# EAGLE board olimex (EAGLE 5.10)
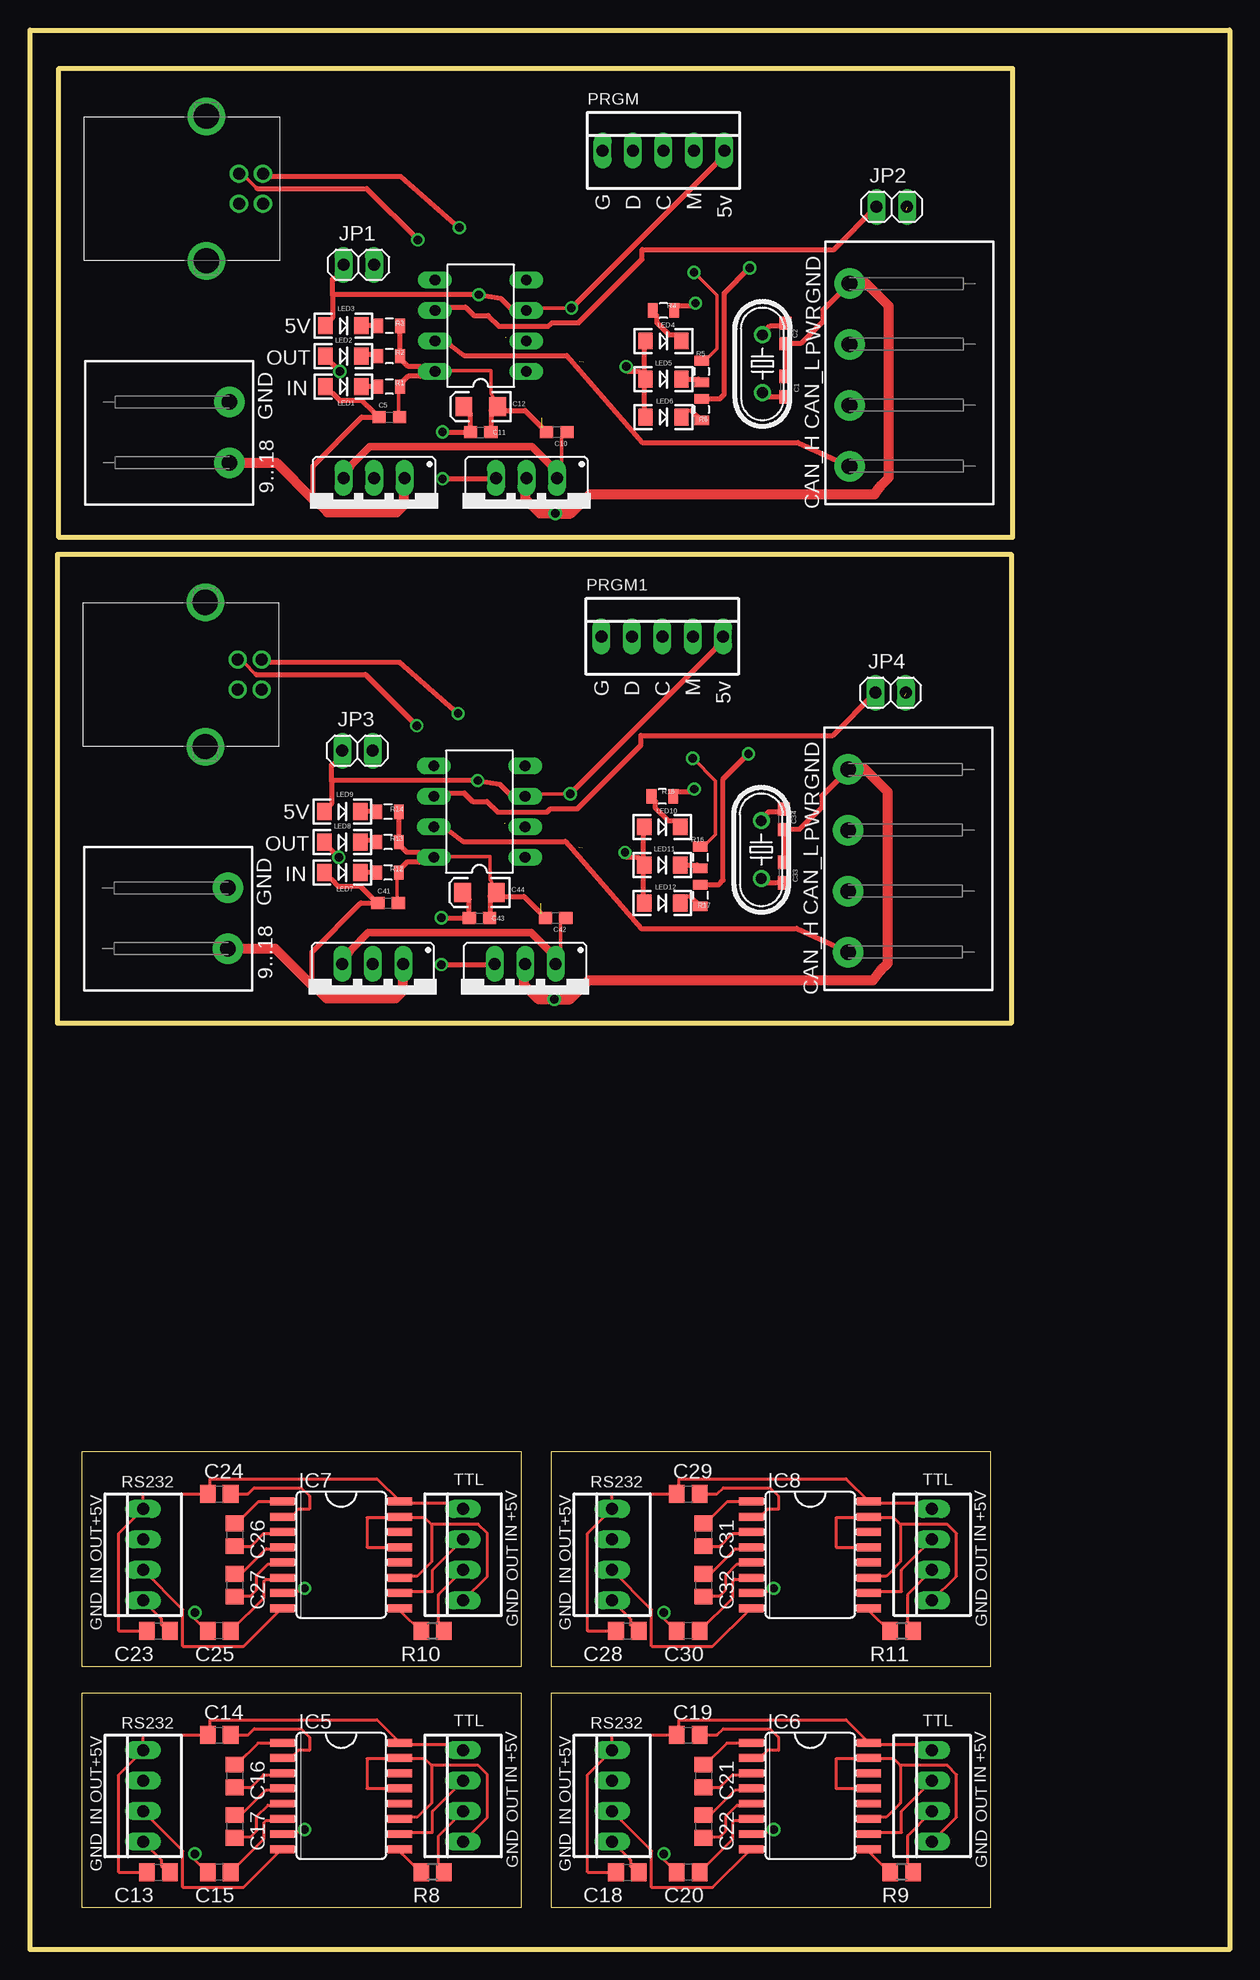
[diagram p0: board, top side]
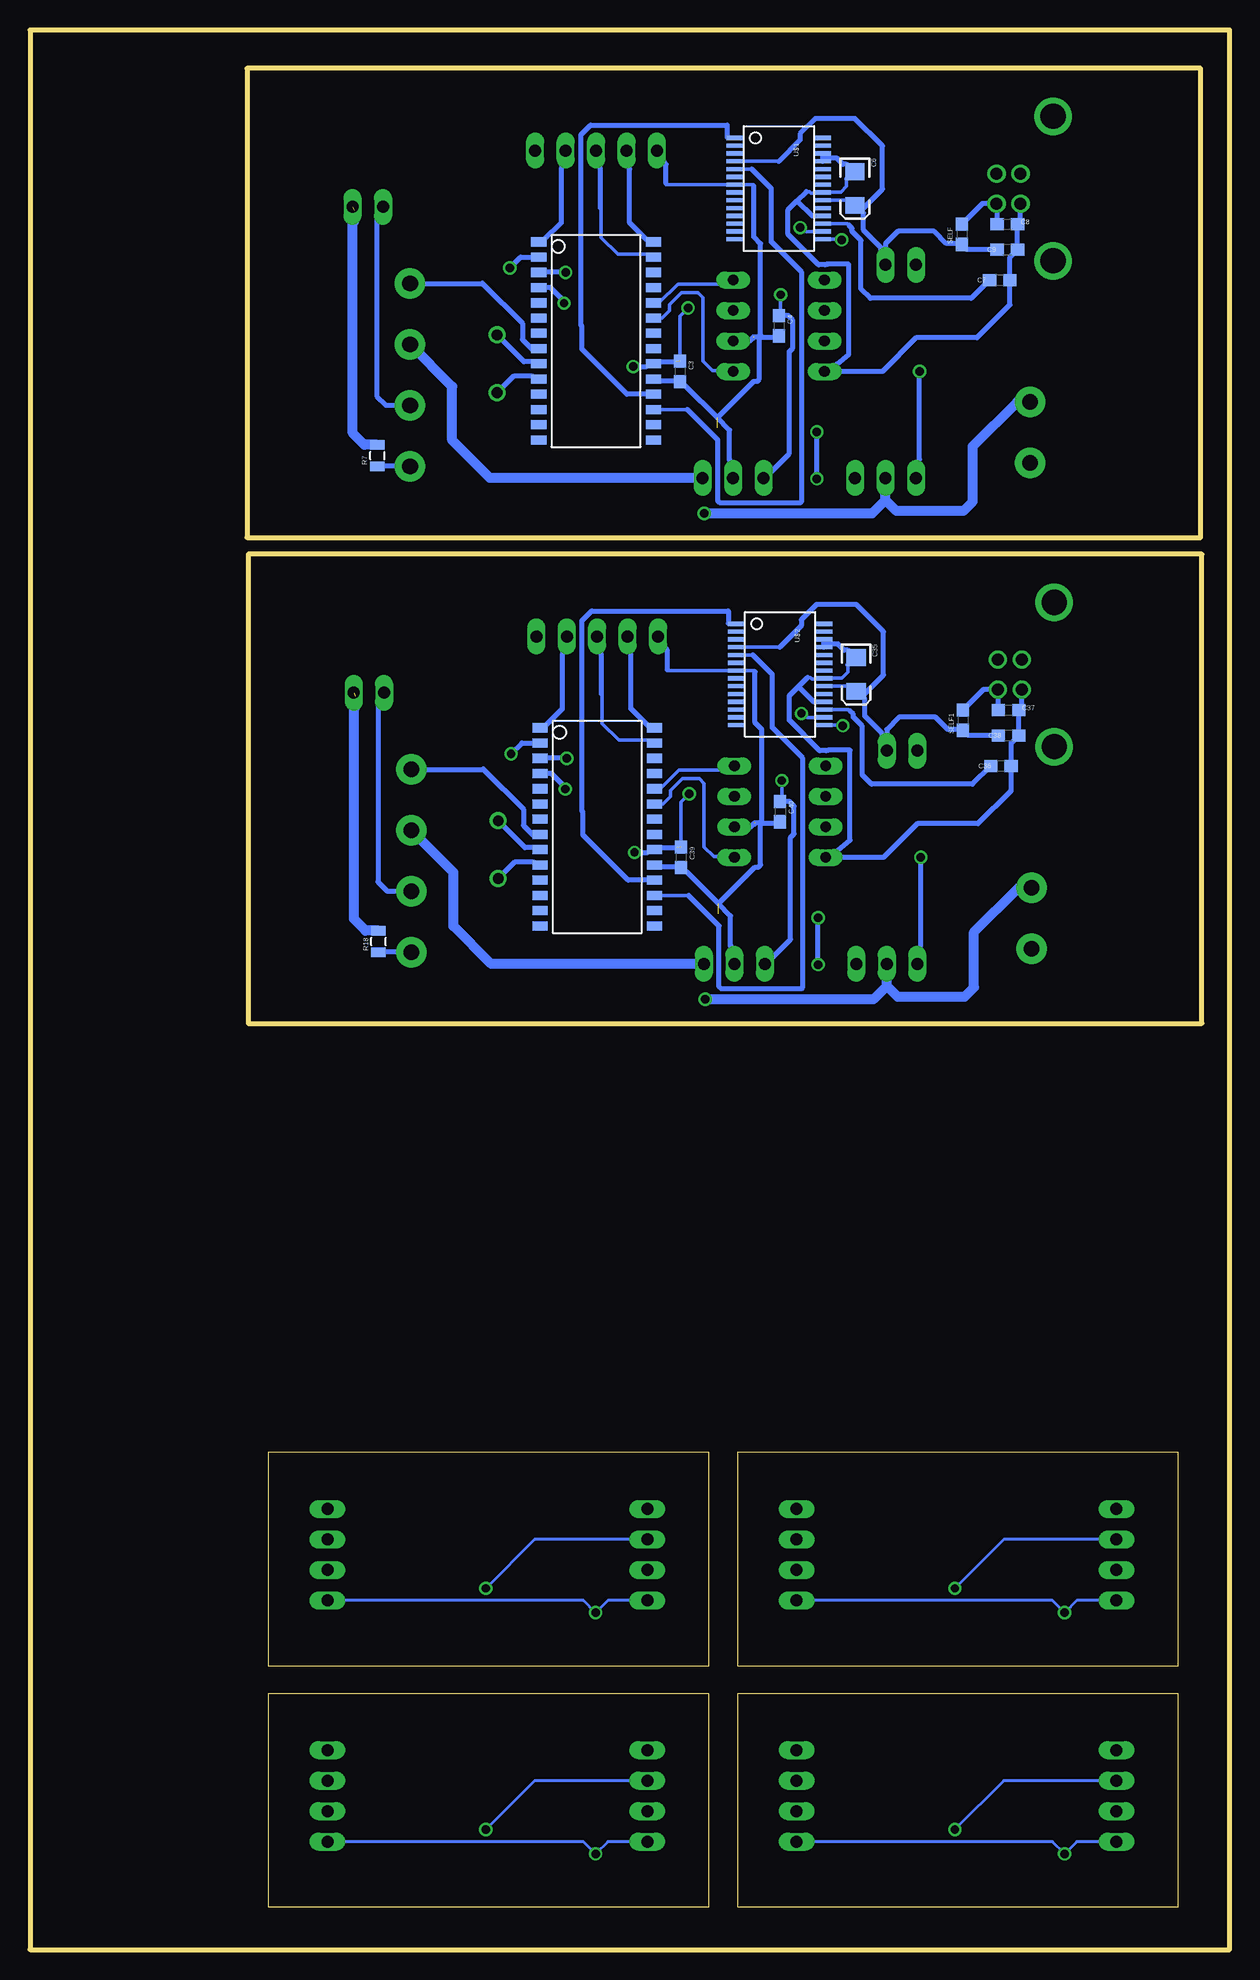
[diagram p1: board, bottom side, seen from below]

Size 100 x 160 mm. Coordinates in mm from the lower left corner, seen from the top.
Outline: 2.4,117.7 2.4,156.8 81.9,156.8 81.9,117.7 2.4,117.7
Outline: 0,160 100,160 100,0 0,0 0,160
Outline: 4.32,3.51 40.99,3.51 40.99,21.36 4.32,21.36 4.32,3.51
Outline: 43.42,3.51 80.09,3.51 80.09,21.36 43.42,21.36 43.42,3.51
Outline: 4.32,23.61 40.99,23.61 40.99,41.46 4.32,41.46 4.32,23.61
Outline: 43.42,23.61 80.09,23.61 80.09,41.46 43.42,41.46 43.42,23.61
Outline: 2.3,77.2 2.3,116.3 81.8,116.3 81.8,77.2 2.3,77.2
Copper layers (1*16): Top 0.035mm / dielectric 1.5mm / Bottom 0.035mm
Design rules "10mils": minimum track width 10mil, minimum drill 24mil, track to track 10mil, track to pad 10mil, pad to pad 10mil, via to via 10mil, smd to smd 10mil, copper to edge 40mil, drill to drill 10mil, minimum pad ring 10mil, minimum via ring 8mil, stop-mask expansion 0mil, vias tented up to drill 0mil, thermal gap 10mil

## Footprints (pad centres in the part's own frame; a part is rotated, then mirrored left to right if it is on the bottom)
0603 = smd 1.1 x 1: 1 -0.85,0; 2 0.85,0
EIA3216 = smd 1.4 x 1.6: A 1.4,0; C -1.4,0
C0805 = smd 1.3 x 1.5: 1 -0.95,0; 2 0.95,0
508_2 = drill 1.3 pad 2.54 round: P$1 -3.81,-5.08; P$2 1.27,-5.08
508_4 = drill 1.3 pad 2.54 round: P$1 -7.62,-5.08; P$2 -2.54,-5.08; P$3 2.54,-5.08; P$4 7.62,-5.08
SO28W = smd 0.762 x 1.27: 1 -7.62,-4.78; 2 -6.35,-4.78; 3 -5.08,-4.78; 4 -3.81,-4.78; 5 -2.54,-4.78; 6 -1.27,-4.78; 7 0,-4.78; 8 1.27,-4.78; 9 2.54,-4.78; 10 3.81,-4.78; 11 5.08,-4.78; 12 6.35,-4.78; 13 7.62,-4.78; 14 8.89,-4.78; 15 8.89,4.78; 16 7.62,4.78; 17 6.35,4.78; 18 5.08,4.78; 19 3.81,4.78; 20 2.54,4.78; 21 1.27,4.78; 22 0,4.78; 23 -1.27,4.78; 24 -2.54,4.78; 25 -3.81,4.78; 26 -5.08,4.78; 27 -6.35,4.78; 28 -7.62,4.78
78XXS = drill 1 long: GND 0,-2.54; IN -2.54,-2.54; OUT 2.54,-2.54
DIL08 = drill 0.9 long: 1 -3.81,-3.81; 2 -1.27,-3.81; 3 1.27,-3.81; 4 3.81,-3.81; 5 3.81,3.81; 6 1.27,3.81; 7 -1.27,3.81; 8 -3.81,3.81
SO16L = smd 0.66 x 2.032: 1 -4.445,-4.902; 2 -3.175,-4.902; 3 -1.905,-4.902; 4 -0.635,-4.902; 5 0.635,-4.902; 6 1.905,-4.902; 7 3.175,-4.902; 8 4.445,-4.902; 9 4.445,4.902; 10 3.175,4.902; 11 1.905,4.902; 12 0.635,4.902; 13 -0.635,4.902; 14 -1.905,4.902; 15 -3.175,4.902; 16 -4.445,4.902
1X02 = drill 1 long: 1 -1.27,0; 2 1.27,0
LED-1206 = smd 1.2 x 1.4: A -1.5,0; C 1.5,0
22-23-2051 = drill 1 long: 1 -5.08,0; 2 -2.54,0; 3 0,0; 4 2.54,0; 5 5.08,0
HC49U-V = drill 0.9 round: 1 -2.413,0; 2 2.413,0
0805 = smd 0.8 x 1.2: 1 -0.9,0; 2 0.9,0
R0805 = smd 1.3 x 1.5: 1 -0.95,0; 2 0.95,0
SSOP28DB = smd 0.348 x 1.397: 1 -4.225,-3.656; 2 -3.575,-3.656; 3 -2.925,-3.656; 4 -2.275,-3.656; 5 -1.625,-3.656; 6 -0.975,-3.656; 7 -0.325,-3.656; 8 0.325,-3.656; 9 0.975,-3.656; 10 1.625,-3.656; 11 2.275,-3.656; 12 2.925,-3.656; 13 3.575,-3.656; 14 4.225,-3.656; 15 4.225,3.656; 16 3.575,3.656; 17 2.925,3.656; 18 2.275,3.656; 19 1.625,3.656; 20 0.975,3.656; 21 0.325,3.656; 22 -0.325,3.656; 23 -0.975,3.656; 24 -1.625,3.656; 25 -2.275,3.656; 26 -2.925,3.656; 27 -3.575,3.656; 28 -4.225,3.656
22-23-2041 = drill 1 long: 1 -3.81,0; 2 -1.27,0; 3 1.27,0; 4 3.81,0
85-32004-10X = drill 1 pad 1.27 round: 1 4.71,-1.25; 2 4.71,1.25; 3 2.71,1.25; 4 2.71,-1.25 | drill 2.1 pad 3 round: M1 0,6.02; M2 0,-6.02

## Placement (x,y rotation side)
C1  [0603]  62.97,130.27 270 top
C2  [0603]  62.97,134.72 90 top
C3  0,1u  [0603]  45.83,131.54 270 bottom
C4  0,1u  [0603]  37.57,135.35 270 bottom
C5  0,1u  [0603]  29.95,127.73 0 top
C6  10u  [EIA3216]  31.22,146.78 270 bottom
C7  0,1u  [0603]  19.16,139.16 0 bottom
C8  10n  [0603]  18.52,143.81 0 bottom
C9  0,1u  [0603]  18.52,141.7 0 bottom
C10  0,1u  [0603]  43.92,126.46 180 top
C11  0,1u  [0603]  37.57,126.46 0 top
C12  10u  [EIA3216]  37.57,128.6 180 top
C13  0.1u  [C0805]  10.7,6.45 0 top
C14  0.1  [C0805]  15.78,17.88 0 top
C15  0.1  [C0805]  15.78,6.45 180 top
C16  0.1  [C0805]  17.05,14.47 270 top
C17  0.1  [C0805]  17.05,10.26 270 top
C18  0.1u  [C0805]  49.8,6.45 0 top
C19  0.1  [C0805]  54.88,17.88 0 top
C20  0.1  [C0805]  54.88,6.45 180 top
C21  0.1  [C0805]  56.15,14.47 270 top
C22  0.1  [C0805]  56.15,10.26 270 top
C23  0.1u  [C0805]  10.7,26.55 0 top
C24  0.1  [C0805]  15.78,37.98 0 top
C25  0.1  [C0805]  15.78,26.55 180 top
C26  0.1  [C0805]  17.05,34.57 270 top
C27  0.1  [C0805]  17.05,30.36 270 top
C28  0.1u  [C0805]  49.8,26.55 0 top
C29  0.1  [C0805]  54.88,37.98 0 top
C30  0.1  [C0805]  54.88,26.55 180 top
C31  0.1  [C0805]  56.15,34.57 270 top
C32  0.1  [C0805]  56.15,30.36 270 top
C33  [0603]  62.87,89.77 270 top
C34  [0603]  62.87,94.22 90 top
C35  10u  [EIA3216]  31.12,106.28 270 bottom
C36  0,1u  [0603]  19.05,98.66 0 bottom
C37  10n  [0603]  18.42,103.31 0 bottom
C38  0,1u  [0603]  18.42,101.2 0 bottom
C39  0,1u  [0603]  45.73,91.04 270 bottom
C40  0,1u  [0603]  37.47,94.85 270 bottom
C41  0,1u  [0603]  29.85,87.23 0 top
C42  0,1u  [0603]  43.82,85.96 180 top
C43  0,1u  [0603]  37.47,85.96 0 top
C44  10u  [EIA3216]  37.47,88.1 180 top
CAMDEN_2P1  [508_2]  11.54,127.73 90 top
CAMDEN_2P2  [508_2]  11.44,87.23 90 top
CAMDEN_4P-1  [508_4]  73.39,131.25 270 top
CAMDEN_4P-2  [508_4]  73.3,90.75 270 top
DRILEGEND  [DRILEGEND]  -0.2,-4.01 0 top  (outside the outline)
IC1  PIC18F2580-E/SO  [SO28W]  52.81,134.72 270 bottom
IC2  7812  [78XXS]  28.68,120.11 180 top
IC3  PCA82C250  [DIL08]  37.57,135.35 90 top
IC4  7805  [78XXS]  41.38,120.11 180 top
IC5  MAX232ECWE  [SO16L]  25.94,12.8 270 top
IC6  MAX232ECWE  [SO16L]  65.04,12.8 270 top
IC7  MAX232ECWE  [SO16L]  25.94,32.9 270 top
IC8  MAX232ECWE  [SO16L]  65.04,32.9 270 top
IC9  PIC18F2580-E/SO  [SO28W]  52.71,94.22 270 bottom
IC10  PCA82C250  [DIL08]  37.47,94.85 90 top
IC11  7812  [78XXS]  28.58,79.61 180 top
IC12  7805  [78XXS]  41.28,79.61 180 top
JP1  [1X02]  27.41,140.43 180 top
JP2  [1X02]  71.85,145.25 180 top
JP3  [1X02]  27.31,99.93 180 top
JP4  [1X02]  71.75,104.75 180 top
LED1  [LED-1206]  26.14,130.27 0 top
LED2  [LED-1206]  26.14,132.81 0 top
LED3  [LED-1206]  26.14,135.35 0 top
LED4  [LED-1206]  52.81,134.08 0 top
LED5  [LED-1206]  52.81,130.91 0 top
LED6  [LED-1206]  52.81,127.73 0 top
LED7  [LED-1206]  26.04,89.77 0 top
LED8  [LED-1206]  26.04,92.31 0 top
LED9  [LED-1206]  26.04,94.85 0 top
LED10  [LED-1206]  52.71,93.58 0 top
LED11  [LED-1206]  52.71,90.41 0 top
LED12  [LED-1206]  52.71,87.23 0 top
PRGM  22-23-2051  [22-23-2051]  52.81,149.96 0 top
PRGM1  22-23-2051  [22-23-2051]  52.71,109.45 0 top
Q1  [HC49U-V]  61.06,132.18 90 top
Q2  [HC49U-V]  60.97,91.67 90 top
R1  560  [0805]  29.95,130.27 180 top
R2  560  [0805]  29.95,132.81 180 top
R3  560  [0805]  29.95,135.35 180 top
R4  560  [0805]  52.81,136.62 180 top
R5  560  [0805]  55.98,131.54 270 top
R6  560  [0805]  55.98,128.37 270 top
R7  120  [0805]  71.05,124.53 90 bottom
R8  470  [R0805]  33.56,6.45 180 top
R9  470  [R0805]  72.66,6.45 180 top
R10  470  [R0805]  33.56,26.55 180 top
R11  470  [R0805]  72.66,26.55 180 top
R12  560  [0805]  29.85,89.77 180 top
R13  560  [0805]  29.85,92.31 180 top
R14  560  [0805]  29.85,94.85 180 top
R15  560  [0805]  52.71,96.12 180 top
R16  560  [0805]  55.88,91.04 270 top
R17  560  [0805]  55.88,87.86 270 top
R18  120  [0805]  70.94,84.03 90 bottom
SELF  [0603]  22.33,142.97 270 bottom
SELF1  [0603]  22.23,102.47 270 bottom
U$1  FT232RL-BASICSSOP  [SSOP28DB]  37.57,146.78 270 bottom
U$2  FT232RL-BASICSSOP  [SSOP28DB]  37.47,106.28 270 bottom
X1  22-23-2041  [22-23-2041]  36.1,12.8 90 top
X2  MINI-USB_4P-85-32004-10X  [85-32004-10X]  14.71,146.78 0 top
X3  22-23-2041  [22-23-2041]  9.43,12.8 90 top
X4  22-23-2041  [22-23-2041]  75.2,12.8 90 top
X5  22-23-2041  [22-23-2041]  48.53,12.8 90 top
X6  22-23-2041  [22-23-2041]  36.1,32.9 90 top
X7  22-23-2041  [22-23-2041]  9.43,32.9 90 top
X8  22-23-2041  [22-23-2041]  75.2,32.9 90 top
X9  22-23-2041  [22-23-2041]  48.53,32.9 90 top
X10  MINI-USB_4P-85-32004-10X  [85-32004-10X]  14.61,106.28 0 top

## Library data of the parts
C1-C12 C33-C44 LED1-LED12 R1-R7 R12-R18 SELF SELF1 U$1 U$2 = SparkFun
C13-C32 R8-R11 = rcl
CAMDEN_2P1 CAMDEN_2P2 CAMDEN_4P-1 CAMDEN_4P-2 = mycomponents
DRILEGEND = drilegend
IC1 IC9 = microchip
IC2 IC4 IC11 IC12 = v-reg
IC3 IC10 = micro-philips
IC5-IC8 = maxim
JP1-JP4 = pinhead
PRGM PRGM1 X1 X3-X9 = con-molex
Q1 Q2 = crystal
X2 X10 = con-cypressindustries

## Nets
5V: C3.1 C4.1 C11.1 C12.A IC1.20 IC3.3 IC4.OUT JP1.2 LED3.A LED4.A LED5.A LED6.A PRGM.5
5V1: C39.1 C40.1 C43.1 C44.A IC9.20 IC10.3 IC12.OUT JP3.2 LED9.A LED10.A LED11.A LED12.A PRGM1.5
+5V: C13.1 C14.1 IC5.16 X1.4 X3.4
+5V1: C18.1 C19.1 IC6.16 X4.4 X5.4
+5V2: C23.1 C24.1 IC7.16 X6.4 X7.4
+5V3: C28.1 C29.1 IC8.16 X8.4 X9.4
+12V: C10.1 CAMDEN_4P-1.P$2 IC2.OUT IC4.IN LED2.A
+12V1: C42.1 CAMDEN_4P-2.P$2 IC11.OUT IC12.IN LED8.A
+18V: C5.1 CAMDEN_2P1.P$1 IC2.IN LED1.A
+18V1: C41.1 CAMDEN_2P2.P$1 IC11.IN LED7.A
CAN_H: CAMDEN_4P-1.P$4 IC3.7 R7.1
CAN_H1: CAMDEN_4P-2.P$4 IC10.7 R18.1
CAN_L: CAMDEN_4P-1.P$3 IC3.6 JP2.2
CAN_L1: CAMDEN_4P-2.P$3 IC10.6 JP4.2
GND: C1.1 C2.1 C3.2 C4.2 C5.2 C6.C C7.2 C8.2 C9.2 C10.2 C11.2 C12.C CAMDEN_2P1.P$2 CAMDEN_4P-1.P$1 IC1.8 IC1.19 IC2.GND IC3.2 IC3.8 IC4.GND PRGM.1 R1.1 R2.1 R3.1 U$1.7 U$1.18 U$1.21 U$1.25 U$1.26 X2.4
GND1: C13.2 C15.2 IC5.11 IC5.13 IC5.15 X1.1 X3.1
GND2: C18.2 C20.2 IC6.11 IC6.13 IC6.15 X4.1 X5.1
GND3: C23.2 C25.2 IC7.11 IC7.13 IC7.15 X6.1 X7.1
GND4: C28.2 C30.2 IC8.11 IC8.13 IC8.15 X8.1 X9.1
GND5: C33.1 C34.1 C35.C C36.2 C37.2 C38.2 C39.2 C40.2 C41.2 C42.2 C43.2 C44.C CAMDEN_2P2.P$2 CAMDEN_4P-2.P$1 IC9.8 IC9.19 IC10.2 IC10.8 IC11.GND IC12.GND PRGM1.1 R12.1 R13.1 R14.1 U$2.7 U$2.18 U$2.21 U$2.25 U$2.26 X10.4
MCLR: IC1.1 PRGM.4
MCLR1: IC9.1 PRGM1.4
N$1: C2.2 IC1.9 Q1.2
N$2: C1.2 IC1.10 Q1.1
N$3: IC1.23 IC3.1
N$4: C8.1 SELF.1 X2.1
N$5: C6.A C9.1 JP1.1 SELF.2 U$1.4 U$1.20
N$6: U$1.16 X2.2
N$7: C7.1 U$1.17
N$8: U$1.15 X2.3
N$9: IC1.24 IC3.4
N$10: LED1.C R1.2
N$11: LED2.C R2.2
N$12: LED3.C R3.2
N$13: LED4.C R4.2
N$14: IC1.2 R6.1
N$15: LED5.C R5.2
N$16: LED6.C R6.2
N$17: IC1.3 R5.1
N$18: IC1.4 R4.1
N$19: JP2.1 R7.2
N$20: C16.1 IC5.1
N$21: C17.1 IC5.4
N$22: C16.2 IC5.3
N$23: C17.2 IC5.5
N$24: C14.2 IC5.2
N$25: C15.1 IC5.6
N$26: C21.1 IC6.1
N$27: C22.1 IC6.4
N$28: C21.2 IC6.3
N$29: C22.2 IC6.5
N$30: C19.2 IC6.2
N$31: C20.1 IC6.6
N$32: C26.1 IC7.1
N$33: C27.1 IC7.4
N$34: C26.2 IC7.3
N$35: C27.2 IC7.5
N$36: C24.2 IC7.2
N$37: C25.1 IC7.6
N$38: C31.1 IC8.1
N$39: C32.1 IC8.4
N$40: C31.2 IC8.3
N$41: C32.2 IC8.5
N$42: C29.2 IC8.2
N$43: C30.1 IC8.6
N$44: C34.2 IC9.9 Q2.2
N$45: C33.2 IC9.10 Q2.1
N$46: C35.A C38.1 JP3.1 SELF1.2 U$2.4 U$2.20
N$47: C36.1 U$2.17
N$48: U$2.16 X10.2
N$49: U$2.15 X10.3
N$50: IC9.23 IC10.1
N$51: IC9.24 IC10.4
N$52: LED7.C R12.2
N$53: LED8.C R13.2
N$54: LED9.C R14.2
N$55: LED10.C R15.2
N$56: LED11.C R16.2
N$57: LED12.C R17.2
N$58: IC9.2 R17.1
N$59: IC9.3 R16.1
N$60: IC9.4 R15.1
N$61: JP4.1 R18.2
N$62: C37.1 SELF1.1 X10.1
PGC: IC1.27 PRGM.3
PGC1: IC9.27 PRGM1.3
PGD: IC1.28 PRGM.2
PGD1: IC9.28 PRGM1.2
RS_IN: IC5.8 X3.2
RS_IN1: IC6.8 X5.2
RS_IN2: IC7.8 X7.2
RS_IN3: IC8.8 X9.2
RS_OUT: IC5.7 X3.3
RS_OUT1: IC6.7 X5.3
RS_OUT2: IC7.7 X7.3
RS_OUT3: IC8.7 X9.3
RX: IC1.18 U$1.1
RX1: IC9.18 U$2.1
TTL_IN: IC5.10 X1.3
TTL_IN1: IC6.10 X4.3
TTL_IN2: IC7.10 X6.3
TTL_IN3: IC8.10 X8.3
TTL_OUT: R8.1 X1.2
TTL_OUT1: R9.1 X4.2
TTL_OUT2: R10.1 X6.2
TTL_OUT3: R11.1 X8.2
TTL_OUT_: IC5.9 R8.2
TTL_OUT_1: IC6.9 R9.2
TTL_OUT_2: IC7.9 R10.2
TTL_OUT_3: IC8.9 R11.2
TX: IC1.17 U$1.5
TX1: IC9.17 U$2.5

## Tracks (layer width: path | path; a pad name or v marks a point on that pad's centre or on a via)
5V  (via drill 0.7, 0.7 pad 0.25)  (1 unrouted)
  Top 0.305: LED6.A 51.23,128.29 | 51.23,130.32 LED5.A | 51.23,133.57 LED4.A | LED5.A 51.23,131.54 | LED5.A 50.83,131.54 | 25.23,139.26 25.43,139.26 | v45.14,136.82 42.7,136.82 IC3.3
  Top 0.406: 51.23,128.29 51.23,130.32 | 51.23,131.54 51.23,133.57 | v49.71,131.95 49.81,131.54 50.83,131.54 | 25.23,137.94 25.23,139.26 | 25.23,137.94 25.23,136.01 LED3.A | 25.43,139.26 JP1.2 | 25.23,137.94 v37.42,137.94 39.25,137.64 40.06,136.82 IC3.3 | v45.14,136.82 57.13,148.81 PRGM.5 | C12.A 36.72,128.05 C11.1 34.44,126.46 v34.4,126.5 | v34.4,122.6 38.79,122.6 IC4.OUT
  Bottom 0.305: 47.58,132.35 IC1.20 48.59,131.95 | v37.42,137.94 37.42,136.62 C4.1 | C3.1 45.83,136.14 v45.14,136.82
  Bottom 0.406: 47.58,132.35 46.16,132.35 | v49.71,131.95 48.59,131.95 | IC4.OUT 38.75,122.65 36.7,124.7 36.7,133.2 36.4,133.5 36.4,135.8 36.8,136.2 C4.1 | v34.4,122.6 v34.4,126.5
5V1  (via drill 0.7, 0.7 pad 0.25)  (1 unrouted)
  Top 0.305: LED12.A 51.13,87.79 | 51.13,89.82 LED11.A | 51.13,93.07 LED10.A | LED11.A 51.13,91.04 | LED11.A 50.73,91.04 | 25.13,98.76 25.33,98.76 | v45.04,96.32 42.6,96.32 IC10.3
  Top 0.406: 51.13,87.79 51.13,89.82 | 51.13,91.04 51.13,93.07 | v49.61,91.45 49.71,91.04 50.73,91.04 | 25.13,97.44 25.13,98.76 | 25.13,97.44 25.13,95.51 LED9.A | 25.33,98.76 JP3.2 | 25.13,97.44 v37.32,97.44 39.15,97.14 39.96,96.32 IC10.3 | v45.04,96.32 57.03,108.31 PRGM1.5 | C44.A 36.62,87.55 C43.1 34.34,85.96 v34.3,86 | v34.3,82.1 38.69,82.1 IC12.OUT
  Bottom 0.305: 47.48,91.85 IC9.20 48.49,91.45 | v37.32,97.44 37.32,96.12 C40.1 | C39.1 45.73,95.64 v45.04,96.32
  Bottom 0.406: 47.48,91.85 46.05,91.85 | v49.61,91.45 48.49,91.45 | IC12.OUT 38.65,82.15 36.6,84.2 36.6,92.7 36.3,93 36.3,95.3 36.7,95.7 C40.1 | v34.3,82.1 v34.3,86
+5V
  Top 0.254: X1.4 36.1,17.12 31.02,17.12 IC5.16 | C13.1 7.4,6.45 7.4,14.58 X3.4 9.43,17.88 C14.1 15.02,17.88 15.02,19.15 28.94,19.15 IC5.16 | IC5.16 30.77,17.37
+5V1
  Top 0.254: X4.4 75.2,17.12 70.12,17.12 IC6.16 | C18.1 46.5,6.45 46.5,14.58 X5.4 48.53,17.88 C19.1 54.12,17.88 54.12,19.15 68.04,19.15 IC6.16 | IC6.16 69.87,17.37
+5V2
  Top 0.254: X6.4 36.1,37.22 31.02,37.22 IC7.16 | C23.1 7.4,26.55 7.4,34.68 X7.4 9.43,37.98 C24.1 15.02,37.98 15.02,39.25 28.94,39.25 IC7.16 | IC7.16 30.77,37.47
+5V3
  Top 0.254: X8.4 75.2,37.22 70.12,37.22 IC8.16 | C28.1 46.5,26.55 46.5,34.68 X9.4 48.53,37.98 C29.1 54.12,37.98 54.12,39.25 68.04,39.25 IC8.16 | IC8.16 69.87,37.47
+12V  (via drill 0.7)
  Top 0.305: C10.1 44.33,126.05 44.33,124.02 IC4.IN | 25.23,132.15 LED2.A
  Top 0.406: v25.84,131.54 25.23,132.15
  Top 0.61: IC4.IN 43.31,123.82 41.86,125.27 28.3,125.27 26.85,123.82 IC2.OUT
  Bottom 0.406: v25.84,131.54 25.84,124.22 IC2.OUT
  Bottom 0.813: IC4.IN 61.65,122.65 64.8,125.8 64.8,130.28 CAMDEN_4P-1.P$2
+12V1  (via drill 0.7)
  Top 0.305: C42.1 44.23,85.55 44.23,83.52 IC12.IN | 25.13,91.65 LED8.A
  Top 0.406: v25.73,91.04 25.13,91.65
  Top 0.61: IC12.IN 43.21,83.32 41.76,84.77 28.2,84.77 26.75,83.32 IC11.OUT
  Bottom 0.406: v25.73,91.04 25.73,83.72 IC11.OUT
  Bottom 0.813: IC12.IN 61.55,82.15 64.7,85.3 64.7,89.78 CAMDEN_4P-2.P$2
+18V
  Top 0.305: C5.1 28.68,128.09 | 25.23,129.71 LED1.A
  Top 0.406: 28.68,128.09 27.66,129.1 25.84,129.1 25.23,129.71 | C5.1 27.66,127.73 23.6,123.67 23.6,120.87
  Top 0.813: CAMDEN_2P1.P$1 20.55,123.92 23.6,120.87 23.73,120.87 24.8,119.8 30.6,119.8 31.2,120.4 31.2,122.63 IC2.IN
+18V1
  Top 0.305: C41.1 28.58,87.59 | 25.13,89.21 LED7.A
  Top 0.406: 28.58,87.59 27.56,88.6 25.73,88.6 25.13,89.21 | C41.1 27.56,87.23 23.5,83.17 23.5,80.37
  Top 0.813: CAMDEN_2P2.P$1 20.45,83.42 23.5,80.37 23.63,80.37 24.7,79.3 30.5,79.3 31.1,79.9 31.1,82.13 IC11.IN
CAN_H
  Top 0.406: IC3.7 34.98,133.78 36.2,132.86 44.73,132.86 51.03,125.62 64.04,125.62 CAMDEN_4P-1.P$4
  Bottom 0.406: R7.1 68.32,123.63 CAMDEN_4P-1.P$4
CAN_H1
  Top 0.406: IC10.7 34.88,93.28 36.1,92.36 44.63,92.36 50.93,85.12 63.94,85.12 CAMDEN_4P-2.P$4
  Bottom 0.406: R18.1 CAMDEN_4P-2.P$4
CAN_L
  Top 0.406: IC3.6 34.04,136.9 36.3,136.9 37,136.2 38.2,136.2 39.1,135.3 43.2,135.3 43.5,135.6 45.75,135.6 51.03,140.89 51.03,141.7 67.03,141.7 JP2.2
  Bottom 0.406: CAMDEN_4P-1.P$3 70.31,128.72 71.1,129.5 71.1,144.73 JP2.2
CAN_L1
  Top 0.406: IC10.6 33.94,96.4 36.2,96.4 36.9,95.7 38.1,95.7 39,94.8 43.1,94.8 43.4,95.1 45.65,95.1 50.93,100.39 50.93,101.2 66.93,101.2 JP4.2
  Bottom 0.406: CAMDEN_4P-2.P$3 70.22,88.22 71,89 71,104.23 JP4.2
GND  (via drill 0.7 pad 0.25)  (2 unrouted)
  Top 0.305: 42.7,126.87 C10.2 | 38.43,126.87 C11.2 | 38.43,128.29 C12.C 38.43,129.71 38.43,131.59 34.98,131.59 IC3.8 | C5.2 30.71,128.09 30.71,129.71 R1.1 31.12,130.73
  Top 0.406: 42.7,126.87 41.28,128.29 39.65,128.29 C12.C | 38.43,128.29 38.43,126.87 | 31.12,130.73 31.52,131.13 32.54,131.13 IC3.8 32.54,131.95 31.52,131.95 31.12,132.35 R2.1 R3.1 | C2.1 C1.1 | C2.1 63.3,133.87 | C2.1 64.27,133.87 66.1,135.7 66.1,136.66 CAMDEN_4P-1.P$1
  Top 0.813: IC4.GND 41.3,122.57 41.3,120.9 42.5,119.7 v43.8,119.7 45.1,119.7 46.7,121.3 70.4,121.3 71,122.1 71.6,122.7 71.6,137 69.72,138.88 CAMDEN_4P-1.P$1
  Bottom 0.305: 46.16,130.73 C3.2 45.34,130.32 | 47.58,130.73 IC1.19 | IC3.8 32.74,132.15 | U$1.7 40.79,147.1 | 35.28,146.53 35.03,146.53 34.9,146.4 33.97,146.4 U$1.21 33.87,146.5 32.4,146.5 31.93,146.97 31.93,147.59 | 39.65,146.98 39.65,147.05 39.7,147.1 U$1.7 | U$1.7 46.89,147.1 46.97,147.19
  Bottom 0.406: IC1.8 58.14,133.38 58.96,134.19 58.96,135.56 62.27,138.88 | 46.16,130.73 47.58,130.73 | 42.7,127.68 41.69,126.66 41.69,124.22 IC4.GND | 42.7,127.68 45.34,130.32 | 46.97,147.19 46.97,148.81 PRGM.1 | 31.93,147.59 C6.C 31.93,148.81 32.24,148.81 32.74,149.32 33.65,149.32 U$1.25 U$1.26 | 39.3,134.38 39.65,134.38 | 39.3,134.38 38.03,134.38 C4.2 | 32.74,132.15 31.73,132.96 31.73,140.48 33.56,140.48 33.71,140.43 34.27,140.43 36.81,142.97 36.81,145 36.05,145.76 | 42.7,127.68 39.65,130.73 39.37,130.73 39.2,130.9 39.2,134.28 39.3,134.38 | X2.4 17.42,143.85 C8.2 C9.2 18.3,141.06 C7.2 18.3,137.09 21.06,134.33 26.14,134.33 28.93,131.54 IC3.8 | 36.05,145.76 35.28,146.53 | U$1.18 34.79,144.5 36.05,145.76 | 62.27,138.88 62.3,138.9 | 39.7,134.3 39.7,134.4 40.02,134.08 IC3.2 | 39.65,146.98 39.65,142.75 39.1,142.2 39.1,134.59 39.3,134.38 | CAMDEN_4P-1.P$1 62.27,138.88
  Bottom 0.813: 28.68,120.82 IC2.GND 28.7,122.67 | 28.68,120.82 29.8,119.7 v43.8,119.7 | IC4.GND 41.3,122.57 | CAMDEN_2P1.P$2 17.7,129 21.4,125.3 21.4,120.7 22.2,119.9 27.76,119.9 28.68,120.82
GND1  (via drill 0.7)
  Top 0.254: X3.1 10.95,7.47 10.95,6.96 11.46,6.45 C13.2 | v13.75,7.97 13.75,7.47 14.76,6.45 C15.2 | 31.02,15.85 31.53,15.85 31.58,15.9 32.9,15.9 33.46,15.34 | IC5.11 31.02,11.02 32.29,11.02 33.46,12.19 33.46,15.34 | 31.02,15.85 IC5.15 | X1.1 38.13,11.02 38.13,14.58 37.37,15.34 33.46,15.34 | 31.02,15.85 30.97,15.9 28.1,15.9 28.1,13.44 IC5.13
  Bottom 0.254: X3.1 12.73,8.99 v13.75,7.97 14.76,8.99 X1.1
GND2  (via drill 0.7)
  Top 0.254: X5.1 50.05,7.47 50.05,6.96 50.56,6.45 C18.2 | v52.85,7.97 52.85,7.47 53.86,6.45 C20.2 | 70.12,15.85 70.63,15.85 70.68,15.9 72,15.9 72.56,15.34 | IC6.11 70.12,11.02 71.39,11.02 72.56,12.19 72.56,15.34 | 70.12,15.85 IC6.15 | X4.1 77.23,11.02 77.23,14.58 76.47,15.34 72.56,15.34 | 70.12,15.85 70.07,15.9 67.2,15.9 67.2,13.44 IC6.13
  Bottom 0.254: X5.1 51.83,8.99 v52.85,7.97 53.86,8.99 X4.1
GND3  (via drill 0.7)
  Top 0.254: X7.1 10.95,27.57 10.95,27.06 11.46,26.55 C23.2 | v13.75,28.07 13.75,27.57 14.76,26.55 C25.2 | 31.02,35.95 31.53,35.95 31.58,36 32.9,36 33.46,35.44 | IC7.11 31.02,31.12 32.29,31.12 33.46,32.29 33.46,35.44 | 31.02,35.95 IC7.15 | X6.1 38.13,31.12 38.13,34.68 37.37,35.44 33.46,35.44 | 31.02,35.95 30.97,36 28.1,36 28.1,33.53 IC7.13
  Bottom 0.254: X7.1 12.73,29.09 v13.75,28.07 14.76,29.09 X6.1
GND4  (via drill 0.7)
  Top 0.254: X9.1 50.05,27.57 50.05,27.06 50.56,26.55 C28.2 | v52.85,28.07 52.85,27.57 53.86,26.55 C30.2 | 70.12,35.95 70.63,35.95 70.68,36 72,36 72.56,35.44 | IC8.11 70.12,31.12 71.39,31.12 72.56,32.29 72.56,35.44 | 70.12,35.95 IC8.15 | X8.1 77.23,31.12 77.23,34.68 76.47,35.44 72.56,35.44 | 70.12,35.95 70.07,36 67.2,36 67.2,33.53 IC8.13
  Bottom 0.254: X9.1 51.83,29.09 v52.85,28.07 53.86,29.09 X8.1
GND5  (via drill 0.7 pad 0.25)  (2 unrouted)
  Top 0.305: 42.6,86.37 C42.2 | 38.33,86.37 C43.2 | 38.33,87.79 C44.C 38.33,89.21 38.33,91.09 34.88,91.09 IC10.8 | C41.2 30.61,87.59 30.61,89.21 R12.1 31.02,90.23
  Top 0.406: 42.6,86.37 41.18,87.79 39.55,87.79 C44.C | 38.33,87.79 38.33,86.37 | 31.02,90.23 31.43,90.63 32.44,90.63 IC10.8 32.44,91.45 31.43,91.45 31.02,91.85 R13.1 R14.1 | C34.1 C33.1 | C34.1 63.2,93.36 | C34.1 64.17,93.36 66,95.2 66,96.16 CAMDEN_4P-2.P$1
  Top 0.813: IC12.GND 41.2,82.07 41.2,80.4 42.4,79.2 v43.7,79.2 45,79.2 46.6,80.8 70.3,80.8 70.9,81.6 71.5,82.2 71.5,96.5 69.62,98.38 CAMDEN_4P-2.P$1
  Bottom 0.305: 46.05,90.23 C39.2 45.24,89.82 | 47.48,90.23 IC9.19 | IC10.8 32.64,91.65 | U$2.7 40.69,106.61 | 35.18,106.03 34.93,106.03 34.8,105.9 33.87,105.9 U$2.21 33.77,106 32.3,106 31.83,106.47 31.83,107.09 | 39.55,106.48 39.55,106.55 39.6,106.6 U$2.7 | U$2.7 46.79,106.61 46.87,106.69
  Bottom 0.406: IC9.8 58.04,92.88 58.86,93.69 58.86,95.06 62.17,98.38 | 46.05,90.23 47.48,90.23 | 42.6,87.18 41.59,86.16 41.59,83.72 IC12.GND | 42.6,87.18 45.24,89.82 | 46.87,106.69 46.87,108.31 PRGM1.1 | 31.83,107.09 C35.C 31.83,108.31 32.14,108.31 32.64,108.82 33.55,108.82 U$2.25 U$2.26 | 39.2,93.89 39.55,93.89 | 39.2,93.89 37.93,93.89 C40.2 | 32.64,91.65 31.63,92.46 31.63,99.98 33.46,99.98 33.61,99.93 34.17,99.93 36.71,102.47 36.71,104.5 35.95,105.26 | 42.6,87.18 39.55,90.23 39.27,90.23 39.1,90.4 39.1,93.78 39.2,93.89 | X10.4 17.32,103.36 C37.2 C38.2 18.2,100.56 C36.2 18.2,96.59 20.96,93.83 26.04,93.83 28.83,91.04 IC10.8 | 35.95,105.26 35.18,106.03 | U$2.18 34.69,104 35.95,105.26 | 62.17,98.38 62.2,98.4 | 39.6,93.8 39.6,93.9 39.92,93.58 IC10.2 | 39.55,106.48 39.55,102.25 39,101.7 39,94.08 39.2,93.89 | CAMDEN_4P-2.P$1 62.17,98.38
  Bottom 0.813: 28.58,80.32 IC11.GND 28.6,82.17 | 28.58,80.32 29.7,79.2 v43.7,79.2 | IC12.GND 41.2,82.07 | CAMDEN_2P2.P$2 17.6,88.5 21.3,84.8 21.3,80.2 22.1,79.4 27.66,79.4 28.58,80.32
MCLR
  Bottom 0.406: IC1.1 57.13,142.51 55.71,143.94 55.71,148.41 PRGM.4
MCLR1
  Bottom 0.406: IC9.1 57.03,102.01 55.61,103.44 55.61,107.91 PRGM1.4
N$1
  Top 0.406: Q1.2 61.06,134.72 61.7,135.35 62.76,135.35 C2.2
  Bottom 0.406: IC1.9 58.14,132.35 58.83,132.35 Q1.2
N$2
  Top 0.406: C1.2 61.41,129.42 Q1.1
  Bottom 0.406: IC1.10 58.14,131.13 59.69,131.13 Q1.1
N$3
  Bottom 0.305: IC1.23 47.31,135.99 46.7,136.6 46.7,137.1 45.7,138.1 44.3,138.1 43.9,137.7 43.9,132.4 43.1,131.6 41.44,131.6 IC3.1
N$4
  Bottom 0.406: C8.1 19.37,145.48 X2.1 20.62,145.53 SELF.1
N$5
  Bottom 0.305: 37.58,149.06 U$1.4 | U$1.20 31.64,145.81 C6.A
  Bottom 0.406: 30.73,144.95 C6.A | 30.73,144.95 30.51,144.75 30.51,143.33 29.09,141.9 JP1.1 28.68,142.21 27.66,143.22 24.62,143.22 23.6,142.21 22.42,142.21 SELF.2 21.91,141.7 C9.1 | 37.58,149.06 35.79,150.84 35.79,151.35 34.52,152.62 31.22,152.62 28.93,150.34 28.93,146.75 30.73,144.95
N$6  (via drill 0.7)
  Top 0.254: 19.94,147.8 19.65,147.8 X2.2
  Top 0.406: v35.79,143.53 30.91,147.8 19.94,147.8
  Bottom 0.305: U$1.16 35.27,143.21 v35.79,143.53
N$7
  Bottom 0.305: U$1.17 31.85,143.85 31.73,143.73
  Bottom 0.406: 31.73,143.73 31.47,143.48 31.47,143.22 30.71,142.46 30.71,138.4 29.95,137.64 21.53,137.64 C7.1
N$8  (via drill 0.7)
  Top 0.305: 18.93,146.78 17.91,147.8 17.65,147.8 X2.3
  Top 0.406: v32.34,142.51 28.07,146.78 18.93,146.78
  Bottom 0.305: U$1.15 32.38,142.56 v32.34,142.51
N$9
  Bottom 0.305: IC1.24 47.55,137.25 46,138.8 41.74,138.8 IC3.4
N$10
  Top 0.305: 28.68,130.32 R1.2 | LED1.C 28.07,130.32
  Top 0.406: 28.07,130.32 28.68,130.32
N$11
  Top 0.305: 28.68,132.96 R2.2 | LED2.C 28.07,132.96
  Top 0.406: 28.07,132.96 28.68,132.96
N$12
  Top 0.305: 28.68,135.4 R3.2 | LED3.C 28.07,135.4
  Top 0.406: 28.07,135.4 28.68,135.4
N$13
  Top 0.305: 52.25,136.21 R4.2 | 53.88,134.59 LED4.C
  Top 0.406: 52.25,136.21 52.25,135.6 53.27,134.59 53.88,134.59
N$14  (via drill 0.7 pad 0.3)
  Top 0.406: R6.1 57.52,129.26 57.89,129.63 57.89,138.06 v59.99,140.17
  Bottom 0.406: IC1.2 59.1,141.06 v59.99,140.17
N$15
  Top 0.406: LED5.C 55.72,130.91 R5.2
N$16
  Top 0.305: 55.3,128.29 55.16,128.29 54.89,128.29 LED6.C
  Top 0.406: 55.16,128.29 R6.2
N$17  (via drill 0.7 pad 0.3)
  Top 0.305: 56.25,132.44 57.26,133.44 57.26,137.89 v55.35,139.79
  Top 0.406: R5.1 56.25,132.44
  Bottom 0.406: v55.35,139.79 IC1.3
N$18  (via drill 0.7)
  Top 0.305: R4.1 54.08,137.03
  Top 0.406: 54.08,137.03 55.27,137.03 v55.48,137.23
  Bottom 0.406: v55.48,137.23 55.48,137.38 56.62,138.53 IC1.4
N$19  (1 unrouted)
  Bottom 0.813: R7.2 72.13,125.43 73.1,126.4 73.1,145.23 JP2.1 | 73.1,143.9 73,144 73,144.97
N$20
  Top 0.254: 17.05,15.09 C16.1 17.22,15.42 19,17.2 20.78,17.2 20.86,17.12 IC5.1
N$21
  Top 0.254: 17.05,11.28 C17.1 17.61,11.21 19.71,13.31 20.86,13.31 IC5.4
N$22
  Top 0.254: 17.05,13.31 C16.2 18.42,13.52 19.48,14.58 20.86,14.58 IC5.3
N$23
  Top 0.254: 17.05,9.5 C17.2 17.14,9.4 18.4,9.4 18.9,9.9 18.9,11.1 19.84,12.04 20.86,12.04 IC5.5
N$24
  Top 0.254: 22.37,16.6 22.38,16.61 | IC5.2 21.11,16.1 21.88,16.1 22.37,16.6 | C14.2 18.18,17.88 18.7,18.4 22.6,18.4 23.3,17.7 23.3,16.6 22.37,16.6
N$25
  Top 0.254: 16.8,6.45 C15.1 19.5,9.22 19.5,10.6 19.67,10.77 20.86,10.77 IC5.6
N$26
  Top 0.254: 56.15,15.09 C21.1 56.32,15.42 58.1,17.2 59.88,17.2 59.96,17.12 IC6.1
N$27
  Top 0.254: 56.15,11.28 C22.1 56.71,11.21 58.81,13.31 59.96,13.31 IC6.4
N$28
  Top 0.254: 56.15,13.31 C21.2 57.52,13.52 58.58,14.58 59.96,14.58 IC6.3
N$29
  Top 0.254: 56.15,9.5 C22.2 56.24,9.4 57.5,9.4 58,9.9 58,11.1 58.94,12.04 59.96,12.04 IC6.5
N$30
  Top 0.254: 61.47,16.6 61.48,16.61 | IC6.2 60.21,16.1 60.98,16.1 61.47,16.6 | C19.2 57.28,17.88 57.8,18.4 61.7,18.4 62.4,17.7 62.4,16.6 61.47,16.6
N$31
  Top 0.254: 55.9,6.45 C20.1 58.6,9.22 58.6,10.6 58.77,10.77 59.96,10.77 IC6.6
N$32
  Top 0.254: 17.05,35.19 C26.1 17.22,35.52 19,37.3 20.78,37.3 20.86,37.22 IC7.1
N$33
  Top 0.254: 17.05,31.38 C27.1 17.61,31.31 19.71,33.41 20.86,33.41 IC7.4
N$34
  Top 0.254: 17.05,33.41 C26.2 18.42,33.62 19.48,34.68 20.86,34.68 IC7.3
N$35
  Top 0.254: 17.05,29.6 C27.2 17.14,29.5 18.4,29.5 18.9,30 18.9,31.2 19.84,32.14 20.86,32.14 IC7.5
N$36
  Top 0.254: 22.37,36.7 22.38,36.71 | IC7.2 21.11,36.2 21.88,36.2 22.37,36.7 | C24.2 18.18,37.98 18.7,38.5 22.6,38.5 23.3,37.8 23.3,36.7 22.37,36.7
N$37
  Top 0.254: 16.8,26.55 C25.1 19.5,29.32 19.5,30.7 19.67,30.87 20.86,30.87 IC7.6
N$38
  Top 0.254: 56.15,35.19 C31.1 56.32,35.52 58.1,37.3 59.88,37.3 59.96,37.22 IC8.1
N$39
  Top 0.254: 56.15,31.38 C32.1 56.71,31.31 58.81,33.41 59.96,33.41 IC8.4
N$40
  Top 0.254: 56.15,33.41 C31.2 57.52,33.62 58.58,34.68 59.96,34.68 IC8.3
N$41
  Top 0.254: 56.15,29.6 C32.2 56.24,29.5 57.5,29.5 58,30 58,31.2 58.94,32.14 59.96,32.14 IC8.5
N$42
  Top 0.254: 61.47,36.7 61.48,36.71 | IC8.2 60.21,36.2 60.98,36.2 61.47,36.7 | C29.2 57.28,37.98 57.8,38.5 61.7,38.5 62.4,37.8 62.4,36.7 61.47,36.7
N$43
  Top 0.254: 55.9,26.55 C30.1 58.6,29.32 58.6,30.7 58.77,30.87 59.96,30.87 IC8.6
N$44
  Top 0.406: Q2.2 60.97,94.22 61.6,94.85 62.66,94.85 C34.2
  Bottom 0.406: IC9.9 58.04,91.85 58.73,91.85 Q2.2
N$45
  Top 0.406: C33.2 61.31,88.92 Q2.1
  Bottom 0.406: IC9.10 58.04,90.63 59.59,90.63 Q2.1
N$46
  Bottom 0.305: 37.48,108.56 U$2.4 | U$2.20 31.55,105.31 C35.A
  Bottom 0.406: 30.63,104.45 C35.A | 30.63,104.45 30.41,104.25 30.41,102.83 28.99,101.4 JP3.1 28.58,101.71 27.56,102.72 24.52,102.72 23.5,101.71 22.32,101.71 SELF1.2 21.81,101.2 C38.1 | 37.48,108.56 35.69,110.34 35.69,110.85 34.42,112.12 31.12,112.12 28.83,109.84 28.83,106.25 30.63,104.45
N$47
  Bottom 0.305: U$2.17 31.75,103.36 31.63,103.23
  Bottom 0.406: 31.63,103.23 31.37,102.98 31.37,102.72 30.61,101.96 30.61,97.9 29.85,97.14 21.43,97.14 C36.1
N$48  (via drill 0.7)
  Top 0.254: 19.84,107.3 19.55,107.3 X10.2
  Top 0.406: v35.69,103.03 30.82,107.3 19.84,107.3
  Bottom 0.305: U$2.16 35.16,102.7 v35.69,103.03
N$49  (via drill 0.7)
  Top 0.305: 18.83,106.28 17.81,107.3 17.55,107.3 X10.3
  Top 0.406: v32.24,102.01 27.97,106.28 18.83,106.28
  Bottom 0.305: U$2.15 32.28,102.06 v32.24,102.01
N$50
  Bottom 0.305: IC9.23 47.22,95.48 46.6,96.1 46.6,96.6 45.6,97.6 44.2,97.6 43.8,97.2 43.8,91.9 43,91.1 41.34,91.1 IC10.1
N$51
  Bottom 0.305: IC9.24 47.45,96.75 45.9,98.3 41.64,98.3 IC10.4
N$52
  Top 0.305: 28.58,89.82 R12.2 | LED7.C 27.97,89.82
  Top 0.406: 27.97,89.82 28.58,89.82
N$53
  Top 0.305: 28.58,92.46 R13.2 | LED8.C 27.97,92.46
  Top 0.406: 27.97,92.46 28.58,92.46
N$54
  Top 0.305: 28.58,94.9 R14.2 | LED9.C 27.97,94.9
  Top 0.406: 27.97,94.9 28.58,94.9
N$55
  Top 0.305: 52.15,95.71 R15.2 | 53.78,94.09 LED10.C
  Top 0.406: 52.15,95.71 52.15,95.1 53.17,94.09 53.78,94.09
N$56
  Top 0.406: LED11.C 55.62,90.41 R16.2
N$57
  Top 0.305: 55.2,87.79 55.06,87.79 54.79,87.79 LED12.C
  Top 0.406: 55.06,87.79 R17.2
N$58  (via drill 0.7 pad 0.3)
  Top 0.406: R17.1 57.42,88.77 57.79,89.14 57.79,97.56 v59.9,99.67
  Bottom 0.406: IC9.2 59,100.56 v59.9,99.67
N$59  (via drill 0.7 pad 0.3)
  Top 0.305: 56.15,91.94 57.16,92.94 57.16,97.39 v55.25,99.3
  Top 0.406: R16.1 56.15,91.94
  Bottom 0.406: v55.25,99.3 IC9.3
N$60  (via drill 0.7)
  Top 0.305: R15.1 53.98,96.53
  Top 0.406: 53.98,96.53 55.17,96.53 v55.38,96.73
  Bottom 0.406: v55.38,96.73 55.38,96.88 56.52,98.03 IC9.4
N$61  (1 unrouted)
  Bottom 0.813: R18.2 72.03,84.93 73,85.9 73,104.73 JP4.1 | 73,103.4 72.9,103.5 72.9,104.47
N$62
  Bottom 0.406: C37.1 19.27,104.98 X10.1 20.52,105.03 SELF1.1
PGC
  Bottom 0.305: 52.45,145.15 52.4,145.1 52.4,142.7 50.99,141.29 48.59,141.29 48.37,141.06 IC1.27
  Bottom 0.406: 52.45,145.15 52.45,148.41 PRGM.3
PGC1
  Bottom 0.305: 52.35,104.65 52.3,104.6 52.3,102.2 50.89,100.79 48.49,100.79 48.27,100.56 IC9.27
  Bottom 0.406: 52.35,104.65 52.35,107.91 PRGM1.3
PGD
  Bottom 0.305: IC1.28 48.42,142.34 48.59,142.51
  Bottom 0.406: 48.59,142.51 50.02,143.94 50.02,148.41 PRGM.2
PGD1
  Bottom 0.305: IC9.28 48.32,101.83 48.49,102.01
  Bottom 0.406: 48.49,102.01 49.92,103.44 49.92,107.91 PRGM1.2
RS_IN
  Top 0.254: X3.2 12.73,8.23 12.73,5.18 17.81,5.18 20.86,8.23 IC5.8
RS_IN1
  Top 0.254: X5.2 51.83,8.23 51.83,5.18 56.91,5.18 59.96,8.23 IC6.8
RS_IN2
  Top 0.254: X7.2 12.73,28.33 12.73,25.28 17.81,25.28 20.86,28.33 IC7.8
RS_IN3
  Top 0.254: X9.2 51.83,28.33 51.83,25.28 56.91,25.28 59.96,28.33 IC8.8
RS_OUT  (via drill 0.7)
  Top 0.254: v22.89,10.01 22.89,9.75 21.11,9.75 IC5.7
  Bottom 0.254: v22.89,10.01 18.83,14.07 X3.3
RS_OUT1  (via drill 0.7)
  Top 0.254: v61.99,10.01 61.99,9.75 60.21,9.75 IC6.7
  Bottom 0.254: v61.99,10.01 57.93,14.07 X5.3
RS_OUT2  (via drill 0.7)
  Top 0.254: v22.89,30.11 22.89,29.85 21.11,29.85 IC7.7
  Bottom 0.254: v22.89,30.11 18.83,34.17 X7.3
RS_OUT3  (via drill 0.7)
  Top 0.254: v61.99,30.11 61.99,29.85 60.21,29.85 IC8.7
  Bottom 0.254: v61.99,30.11 57.93,34.17 X9.3
RX
  Bottom 0.305: 41.89,151.05 U$1.1
  Bottom 0.406: 41.89,151.05 41.89,152.06 53.27,152.06 54.08,151.25 54.08,135.4 54,135.32 54,133.4 50.23,129.63 IC1.18
RX1
  Bottom 0.305: 41.79,110.55 U$2.1
  Bottom 0.406: 41.79,110.55 41.79,111.56 53.17,111.56 53.98,110.75 53.98,94.9 53.9,94.82 53.9,92.9 50.13,89.14 IC9.18
TTL_IN
  Top 0.254: X1.3 33.56,11.53 33.56,9.75 31.02,9.75 IC5.10
TTL_IN1
  Top 0.254: X4.3 72.66,11.53 72.66,9.75 70.12,9.75 IC6.10
TTL_IN2
  Top 0.254: X6.3 33.56,31.63 33.56,29.85 31.02,29.85 IC7.10
TTL_IN3
  Top 0.254: X8.3 72.66,31.63 72.66,29.85 70.12,29.85 IC8.10
TTL_OUT
  Top 0.254: X1.2 34.07,9.5 34.07,6.7 34.32,6.45 R8.1
TTL_OUT1
  Top 0.254: X4.2 73.17,9.5 73.17,6.7 73.42,6.45 R9.1
TTL_OUT2
  Top 0.254: X6.2 34.07,29.6 34.07,26.8 34.32,26.55 R10.1
TTL_OUT3
  Top 0.254: X8.2 73.17,29.6 73.17,26.8 73.42,26.55 R11.1
TTL_OUT_
  Top 0.254: R8.2 32.54,6.45 31.02,7.97 31.02,8.23 IC5.9
TTL_OUT_1
  Top 0.254: R9.2 71.64,6.45 70.12,7.97 70.12,8.23 IC6.9
TTL_OUT_2
  Top 0.254: R10.2 32.54,26.55 31.02,28.07 31.02,28.33 IC7.9
TTL_OUT_3
  Top 0.254: R11.2 71.64,26.55 70.12,28.07 70.12,28.33 IC8.9
TX
  Bottom 0.305: 47.58,128.09 IC1.17 45.19,128.37 | 39.83,148.41 U$1.5
  Bottom 0.406: 39.83,148.41 38.2,146.78 38.2,142.34 35.66,139.79 35.66,120.69 35.79,120.57 42.47,120.57 42.65,120.75 42.65,125.83 45.19,128.37
TX1
  Bottom 0.305: 47.48,87.59 IC9.17 45.09,87.86 | 39.73,107.91 U$2.5
  Bottom 0.406: 39.73,107.91 38.1,106.28 38.1,101.83 35.56,99.3 35.56,80.19 35.69,80.07 42.37,80.07 42.55,80.25 42.55,85.33 45.09,87.86

## Text on the board
tPlace: G | D | C | M | 5v | GND | 5V | OUT | PWR | IN | GND | CAN_L | 9...18 | CAN_H | G | D | C | M | 5v | GND | 5V | OUT | PWR | IN | GND | CAN_L | 9...18 | CAN_H
tNames: TTL | TTL | RS232 | +5V | RS232 | +5V | +5V | +5V | IN | IN | OUT | OUT | OUT | OUT | IN | IN | GND | GND | GND | GND | TTL | TTL | RS232 | +5V | RS232 | +5V | +5V | +5V | IN | IN | OUT | OUT | OUT | OUT | IN | IN | GND | GND | GND | GND